# Altium PCB PCB_B.PcbDoc
Units mm, origin at the board's own origin, x right, y up, seen from the top; angles counter-clockwise.
Board outline 200 x 100 mm, 2 copper layers (Top Layer, Bottom Layer), stack 2.071 mm thick; 66 components, 51 nets, 153 pads, 0 vias.
Unrouted connection lines stored in the file: 98.
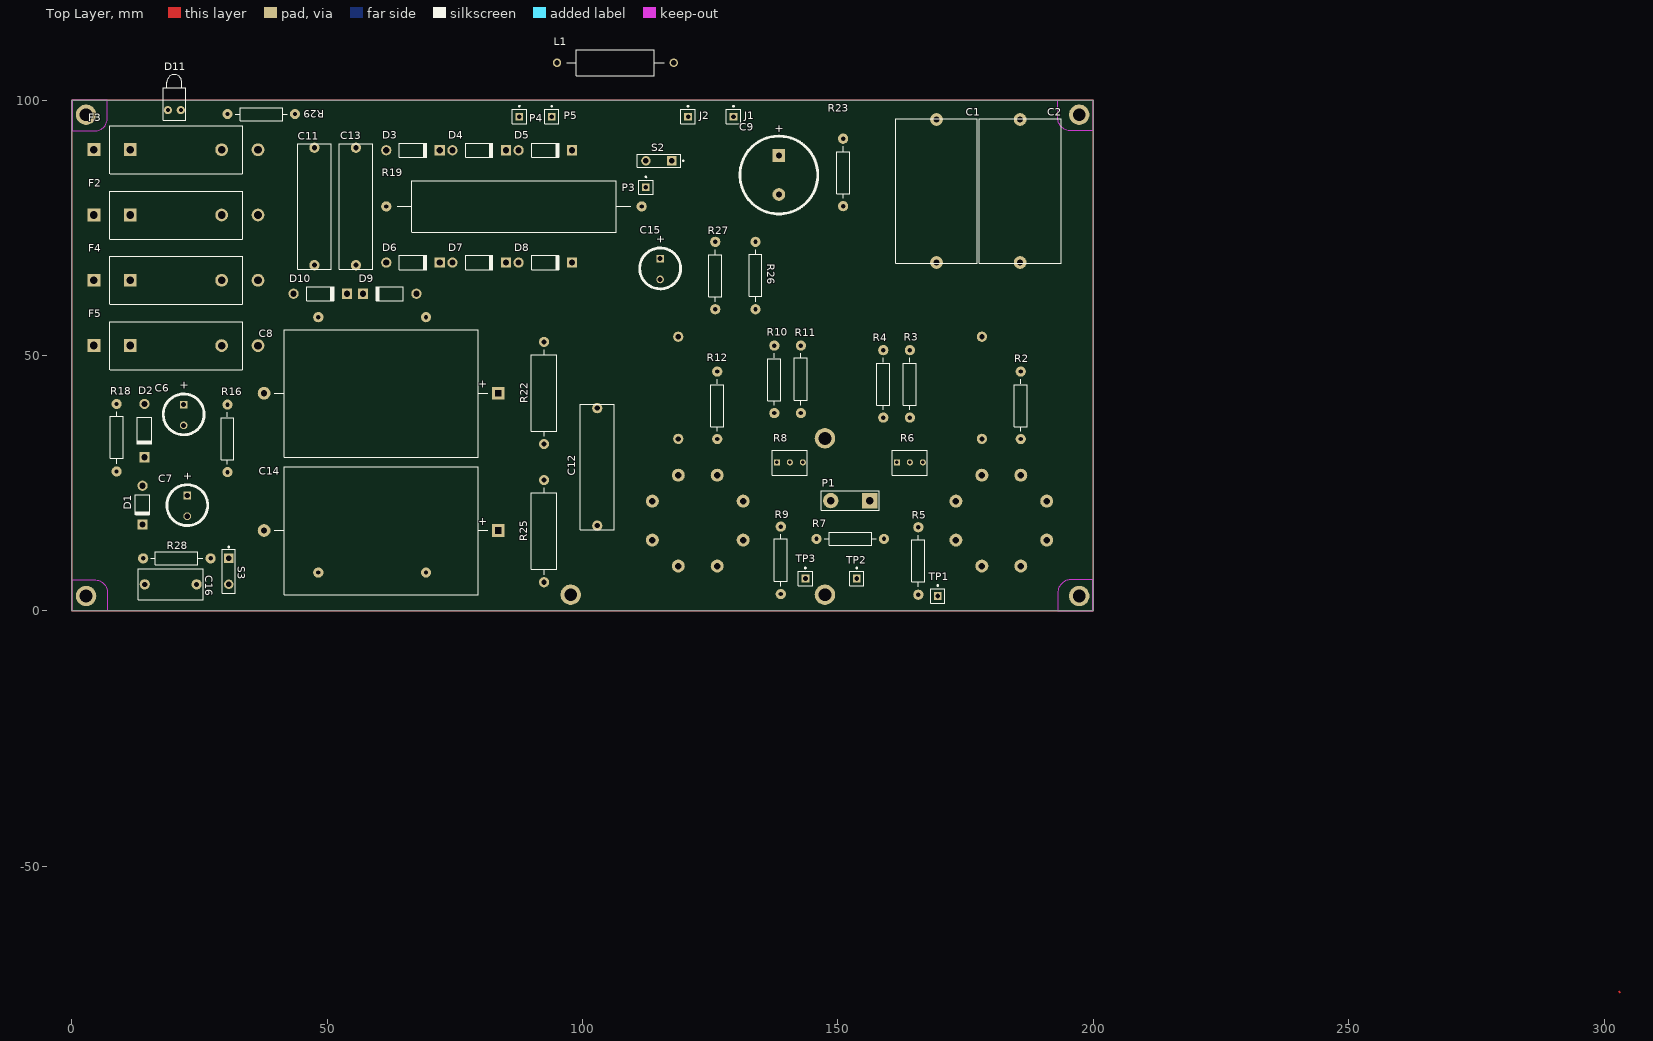
[diagram p0: Top Layer view]
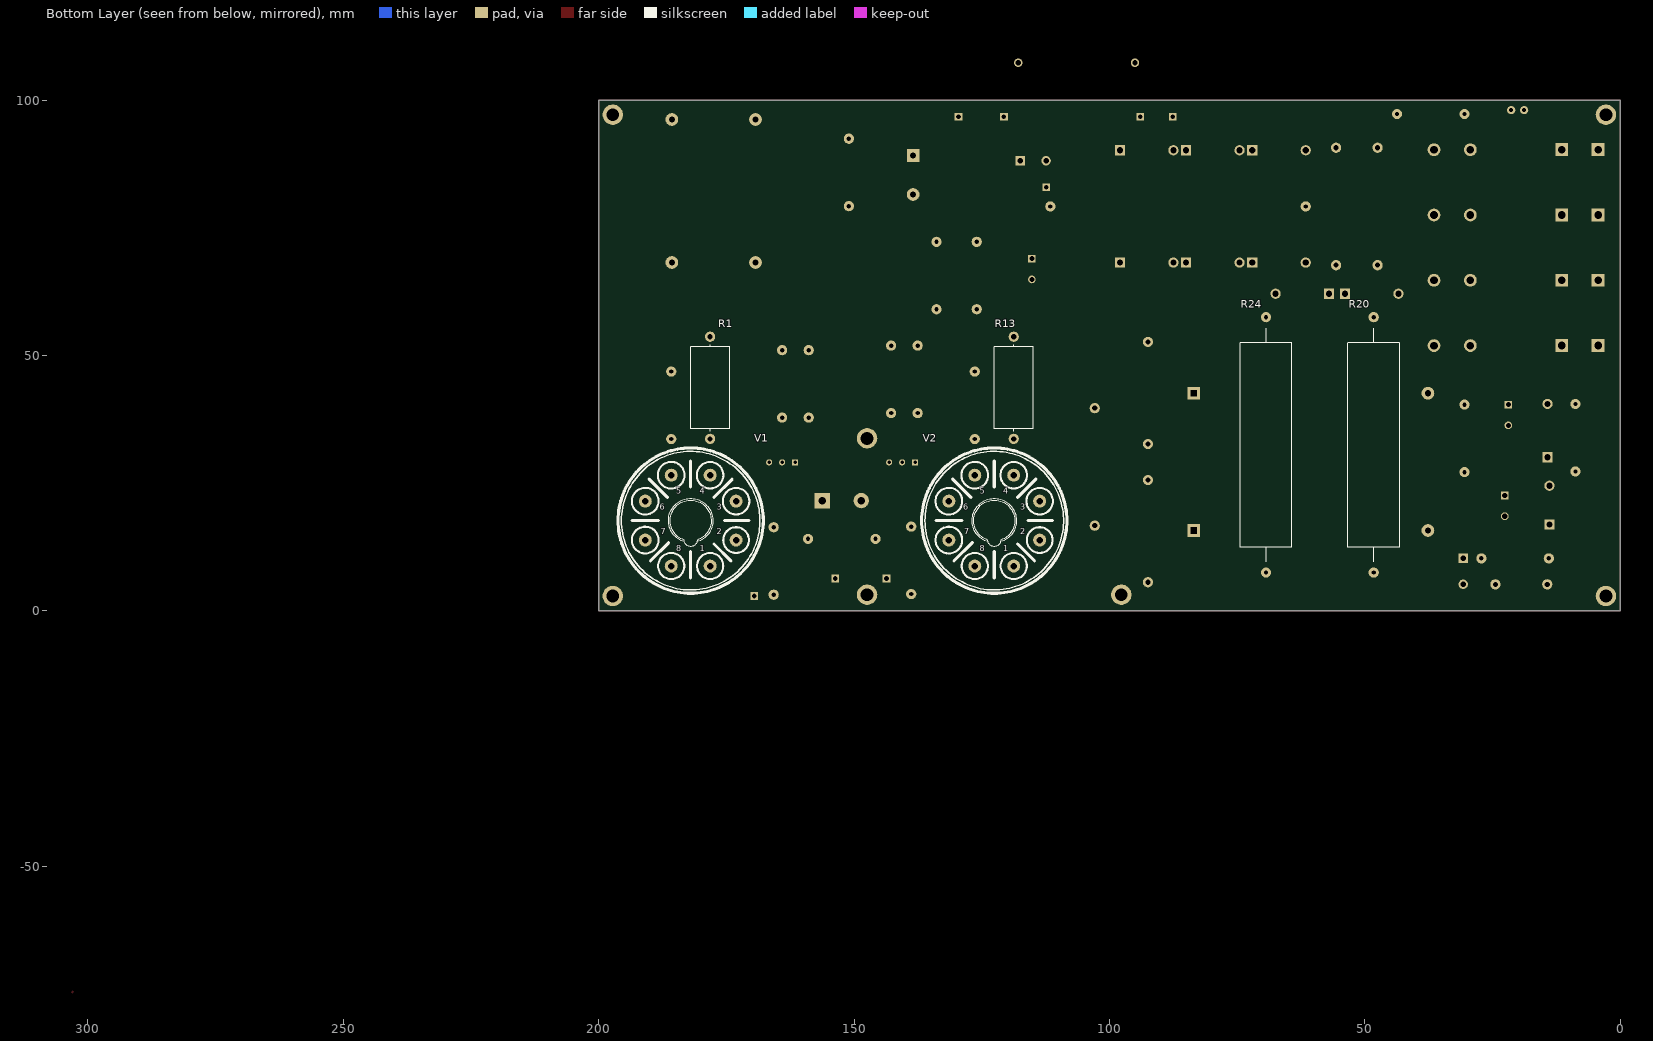
[diagram p1: Bottom Layer view, seen from below]

## Layer stack, top to bottom
Top Solder: solder mask 0.0102, Solder Resist, Dk 3.5
Top Layer: signal copper 0.0356
Dielectric 1: dielectric 2, FR-4, Dk 4.8
Bottom Layer: signal copper 0.0356
Bottom Solder: solder mask 0.0102, Solder Resist, Dk 3.5

## Board outline
0,0 200,0 200,100 0,100

## Design rules (kind name [scope] priority, off if disabled: settings)
Clearance [All] p1: gap=0.254
Height [All] p1: minheight=0 maxheight=35 prefheight=12.7
PolygonConnect [All] p1: connectstyle=Relief reliefconductorwidth=0.254 reliefentries=4 polygonreliefangle="90 Angle" airgapwidth=0.254
RoutingVias [All] p1: holewidth=0.711 width=1.27 viastyle="Through Hole" minholewidth=0.711 minwidth=1.27 maxholewidth=0.711 maxwidth=1.27
SolderMaskExpansion [All] p1: expansion=0.102
Width [All] p1: maxlimit=0.254 minlimit=0.254 preferedwidth=0.254
28 further rules are at their usual default settings.

## Classes and differential pairs
component class powersupply: 1 2 C6 C7 C8 C9 C11 C12 C13 C14 C15 C16 D1 D2 D3 D4 D5 D6 D7 D8 D9 D10 D11 F2 F3 F4 F5 L1 P3 P4 P5 R16 R18 R19 R20 R22 R23 R24 R25 R26 R27 R28 R29 S2 S3
component class poweramp: C1 C2 J1 J2 P1 R1 R2 R3 R4 R5 R6 R7 R8 R9 R10 R11 R12 R13 TP1 TP2 TP3 V1 V2

## Components (designator, comment, footprint, x,y, rotation, side; value= is the part's Value field where it differs from the comment)
C1 "Orange Drop Capacitor" ORANGE-DROP-100nF-600V 169.291,77.216 r270 top
C2 "Orange Drop Capacitor" ORANGE-DROP-100nF-600V 185.674,77.216 r270 top
C6 "Cap Pol Radial Vishay 22uF 100V" RAD-POL-16x20x7.5 21.903,38.481 r90 top
C7 "Cap Pol Radial Vishay 22uF 100V" RAD-POL-16x20x7.5 22.606,20.701 r90 top
C8 "Cap FT Eletrolitic 100uF Axial 350V" "FT Eletrolitic 100uF Axial" 60.503,42.625 r180 top
C9 "Cap Pol Rad" RAD-POL-7.6-15 138.43,85.344 r90 top
C11 "Orange Drop Capacitor" CAP-XICON-100nF-630V 47.498,79.189 r270 top
C12 "Orange Drop Capacitor" CAP-XICON-100nF-630V 102.87,28.194 r90 top
C13 "Orange Drop Capacitor" CAP-XICON-100nF-630V 55.626,79.189 r270 top
C14 "Cap FT Eletrolitic 100uF Axial 350V" "FT Eletrolitic 100uF Axial" 60.503,15.748 r180 top
C15 "Cap Pol Radial Vishay 22uF 100V" RAD-POL-16x20x7.5 115.189,67.056 r90 top
C16 "Orange Drop Capacitor" RAD-0.4 19.355,5.207 r180 top
D1 "D Zener" "ZENER 1W 100V" 13.843,20.701 r270 top
D2 "Diode 1N4007" DO-41 14.224,35.306 r270 top
D3 "Diode 1N4007" "1N4007-10.46mm Diode" 66.802,90.189 r0 top
D4 "Diode 1N4007" "1N4007-10.46mm Diode" 79.756,90.189 r0 top
D5 "Diode 1N4007" "1N4007-10.46mm Diode" 92.71,90.189 r0 top
D6 "Diode 1N4007" "1N4007-10.46mm Diode" 66.802,68.189 r0 top
D7 "Diode 1N4007" "1N4007-10.46mm Diode" 79.756,68.189 r0 top
D8 "Diode 1N4007" "1N4007-10.46mm Diode" 92.71,68.189 r0 top
D9 "Diode 1N4007" "1N4007-10.46mm Diode" 62.23,62.103 r180 top
D10 "Diode 1N4007" "1N4007-10.46mm Diode" 48.641,62.103 r0 top
D11 "POWER LED" LED-1 20.066,98.044 r90 top
F2 "750ma" FUSE-PCB-6x31 20.447,77.512 r0 top
F3 "750ma" FUSE-PCB-6x31 20.447,90.297 r0 top
F4 "6A" FUSE-PCB-6x31 20.447,64.728 r0 top
F5 "6A" FUSE-PCB-6x31 20.447,51.943 r0 top
J1 "Socket" PIN1 129.54,96.774 r0 top
J2 "Socket" PIN1 120.65,96.774 r0 top
L1 "Inductor Iron" AXIAL-0.9 106.426,107.315 r0 top
P1 "OT HEADER" HDR2_pin 152.4,21.59 r180 top
P3 "TO Output Transformer" PIN1 112.395,82.931 r0 top
P4 "To PREAMP" PIN1 87.63,96.774 r0 top
P5 "To PREAMP Filter cap VD" PIN1 93.98,96.774 r0 top
R1 "Wire Wound Power Resistor" "Resistor Vishay 5W 1k Power Wirewound" 178.176,43.688 r90 bottom
R2 "Metal Film Resistor 1/2W" AXIAL-0.6 185.796,40.259 r90 top
R3 "Metal Film Resistor 1/2W" AXIAL-0.6 164.084,44.45 r90 top
R4 "Metal Film Resistor 1/2W" AXIAL-0.6 158.877,44.45 r90 top
R5 "Metal Film Resistor 1/2W" AXIAL-0.6 165.735,9.779 r270 top
R6 "3362U trimpot" "33262U trimpot" 164.084,29.083 r0 top
R7 "Metal Film Resistor 1/2W" AXIAL-0.6 152.4,14.097 r180 top
R8 "3362U trimpot" "33262U trimpot" 140.589,29.083 r0 top
R9 "Metal Film Resistor 1/2W" AXIAL-0.6 138.811,9.906 r270 top
R10 "Metal Film Resistor 1/2W" AXIAL-0.6 137.541,45.339 r90 top
R11 "Metal Film Resistor 1/2W" AXIAL-0.6 142.748,45.339 r270 top
R12 "Metal Film Resistor 1/2W" AXIAL-0.6 126.356,40.259 r90 top
R13 "Wire Wound Power Resistor" "Resistor Vishay 5W 1k Power Wirewound" 118.736,43.688 r90 bottom
R16 "Metal Film Resistor 1W" AXIAL-0.6 30.48,33.782 r90 top
R18 "Metal Film Resistor 1W" AXIAL-0.6 8.763,33.909 r270 top
R19 "Wire Wound Power Resistor" "Power Wirewound Resistor 10W - Vishay Dale" 86.572,79.189 r0 top
R20 "Wire Wound Power Resistor" "Power Wirewound Resistor 10W - Vishay Dale" 48.26,32.512 r90 bottom
R22 "Metal Film Resistor 1W" RESISTOR-MetalOxide-3W 92.456,42.672 r90 top
R23 "Metal Film Resistor 1W" AXIAL-0.6 151.003,85.852 r90 top
R24 "Wire Wound Power Resistor" "Power Wirewound Resistor 10W - Vishay Dale" 69.342,32.512 r270 bottom
R25 "Metal Film Resistor 1W" RESISTOR-MetalOxide-3W 92.456,15.621 r90 top
R26 "Metal Film Resistor 1W" AXIAL-0.6 133.858,65.659 r270 top
R27 "Metal Film Resistor 1W" AXIAL-0.6 125.984,65.659 r90 top
R28 "Metal Film Resistor 1W" AXIAL-0.6 20.574,10.287 r0 top
R29 "Metal Film Resistor 1/2W" AXIAL-0.6 37.084,97.282 r180 top
S2 "STAND-BY" SPST-2 114.935,88.138 r180 top
S3 "STAND-BY" SPST-2 30.734,7.747 r270 top
TP1 "Plug" PIN1 169.545,2.921 r0 top
TP2 "Plug" PIN1 153.67,6.35 r0 top
TP3 "Plug" PIN1 143.637,6.35 r0 top
V1 "EL34-P" OKTAL 181.986,17.678 r180 bottom
V2 "EL34-P" OKTAL 122.546,17.678 r180 bottom

## Footprints (in the part's own frame and the unit in brackets; to place one, negate y for a bottom-side part, rotate by r counter-clockwise, add the part's x,y. Pads: shape width x height; smd on the part's side, far side on the other; paste and mask are expansions set on the pad)
"1N4007-10.46mm Diode" [mm] "Diode, Axial; Body 5.2 x 2.7 mm (LxDia. max), Lead Dia. 0.86 mm (max)"
  round 2 hole 1.2: 1(-5.23,0)
  rect 2x2 hole 1.2: 2(5.23,0)
  silkscreen extent -2.65,-1.4 2.75,1.4, body extent -5.63,-1.31 5.63,1.31, height 3.31
"33262U trimpot" [mm] "Thru-Hole; 3 Leads"
  rect 1.2x1.2 hole 0.7: 1(-2.54,0)
  round 1.2 hole 0.7: 2(0,0) 3(2.54,0)
  silkscreen extent -3.43,-2.54 3.43,2.41, body extent -3.3,-3.75 3.3,3.3, height 4.75
AXIAL-0.6 [mm] "Axial Device, Thru-Hole; 2 Leads; 0.6 in Pin Spacing"
  round 2 hole 0.85: 1(-6.604,0) 2(6.604,0)
  silkscreen extent -5.08,-1.27 5.08,1.27, body extent -6.85,-1.5 6.94,1.5, height 3.5
AXIAL-0.9 [mm] "Axial Device, Thru-Hole; 2 Leads; 0.9 in Pin Spacing"
  round 1.65 hole 1: 1(-11.43,0) 2(11.43,0)
  silkscreen extent -9.53,-2.54 9.53,2.54
CAP-XICON-100nF-630V [mm] "Radial Cap, Thru-Hole; 2 Leads; 0.4 in Pin Spacing"
  round 2 hole 1: 1(-11.5,0) 2(11.5,0)
  silkscreen extent -12.3,-3.3 12.3,3.3, body extent -12,-2.92 11.75,2.83, height 10.92
DO-41 [mm] "Diode, Axial; Body 5.2 x 2.7 mm (LxDia. max), Lead Dia. 0.86 mm (max)"
  round 2 hole 1.2: 1(-5.23,0)
  rect 2x2 hole 1.2: 2(5.23,0)
  silkscreen extent -2.65,-1.4 2.75,1.4
"FT Eletrolitic 100uF Axial" [mm] "FT Axial Eletrolitic Capacitor Thru-Hole; 2 Leads; 45.0mm Pin Spacing"
  rect 2.5x2.5 hole 1.2 square: 1(-22.987,0)
  round 2.5 hole 1.2: 2(22.86,0)
  silkscreen extent -20.96,-12.45 20.83,12.57, body extent -23.14,-12.5 23.14,12.5, height 27.6
FUSE-PCB-6x31 [mm] "Thru-Hole; 2 Leads"
  rect 2.5x2.5 hole 1.5: 1(-16.129,0.017) 1(-9.017,0.017)
  round 2.5 hole 1.5: 2(8.888,0) 2(16,0)
  silkscreen extent -13,-4.7 13,4.7, body extent -16.13,-3.45 16,3.46, height 11.67
HDR2_pin [mm] "Connector; Header; 2 Position"
  rect 3x3 hole 1.5: 1(-3.81,0)
  round 3 hole 1.5: 2(3.81,0)
  silkscreen extent -5.71,-1.91 5.71,1.91
LED-1 [mm] "LED; 2 Leads"
  round 1.6 hole 0.8: 1(0,1.27) 2(0,-1.27)
  silkscreen extent -2,-2.2 6.95,2.2
OKTAL [mm]
  round 2.54 hole 1.27: 1(3.81,-8.89) 2(8.89,-3.81) 3(8.89,3.81) 4(3.81,8.89) 5(-3.81,8.89) 6(-8.89,3.81) 7(-8.89,-3.81) 8(-3.81,-8.89)
  silkscreen extent -14.22,-14.22 14.22,14.22, body extent -14.7,-14.7 14.7,14.7, height 16.7
ORANGE-DROP-100nF-600V [mm] "Orange Drop Capacitor 100nF WxLxH=28x16x25 mm"
  round 2.5 hole 1.2: 1(-19,0) 2(9,0)
  silkscreen extent -19.13,-8 9.14,8, body extent -19.01,-8 9,8, height 21
PIN1 [mm] "Connector; Plug"
  rect 1.5x1.5 hole 0.9: 1(0,0)
  silkscreen extent -1.4,-1.4 1.4,2.17
"Power Wirewound Resistor 10W - Vishay Dale" [mm] "Axial Device, Thru-Hole; 2 Leads; 50mm Pin Spacing"
  round 2 hole 0.85: 1(-25,0) 2(25,0)
  silkscreen extent -22.86,-5.08 22.86,5.08, body extent -25.4,-4.77 25.4,4.83, height 12.3
RAD-0.4 [mm] "Radial Cap, Thru-Hole; 2 Leads; 0.4 in Pin Spacing"
  round 2 hole 1: 1(-5.08,0) 2(5.08,0)
  silkscreen extent -6.35,-3.05 6.35,3.05
RAD-POL-7.6-15 [mm] "Polarized Capacitor (Radial); 2 Leads"
  rect 2.5x2.5 hole 1.2: 1(3.81,0)
  round 2.5 hole 1.2: 2(-3.81,0)
  silkscreen extent -7.62,-7.62 7.62,7.62, body extent -8.18,-8.22 8.25,8.22, height 27
RAD-POL-16x20x7.5 [mm] "Vishay 22uF 100V Polarized Capacitor (Radial); 2 Leads"
  rect 1.5x1.5 hole 1: 1(1.905,0)
  round 1.5 hole 1: 2(-2.159,0)
  silkscreen extent -4,-4 4,4, body extent -4,-3.99 4,3.99, height 13
"Resistor Vishay 5W 1k Power Wirewound" [mm] "Axial Device, Thru-Hole; 2 Leads; 1.0 in Pin Spacing"
  round 2 hole 1: 1(-10,0) 2(10,0)
  silkscreen extent -8.51,-3.81 8.38,3.81, body extent -10.4,-3.75 10.4,3.75, height 9.5
RESISTOR-MetalOxide-3W [mm] "Axial Device, Thru-Hole; 2 Leads; 0.6 in Pin Spacing"
  round 2 hole 1: 1(-10,0) 2(10,0)
  silkscreen extent -8.51,-2.5 8.51,2.5, body extent -11.1,-3.3 11.1,3.3, height 8.3
SPST-2 [mm] "Switch; 2 Leads"
  rect 1.85x1.85 hole 1.1: 1(-2.54,0)
  round 1.85 hole 1.1: 2(2.54,0)
  silkscreen extent -4.89,-1.27 4.28,1.27
"ZENER 1W 100V" [mm] "Zenner Diode - Brand Pending"
  round 2 hole 1.2: 1(-3.81,0)
  rect 2x2 hole 1.2: 2(3.81,0)
  silkscreen extent -2.03,-1.4 2,1.4, body extent -4.2,-1.33 4.2,1.33, height 3.33

## Part data
C1 C2: library part Cap-Orange-DROP_600V, "Capacitor"
C6 C7 C15: "Vishay 22uF 100V Polarized Capacitor (Radial); 2 Leads"
C8 C14: "FT Eletrolitic Polarized Capacitor Axial 100uF"
C9: "Polarized Capacitor (Axial)"
C11 C12 C13 C16: library part Cap-XICON-100nF-630V, "Capacitor XICON (WINE COVER) Polypropilene CAP 630V"
D1: "Zener Diode"
D2 D3 D4 D5 D6 D7 D8 D9 D10: "1 Amp General Purpose Rectifier"
D11: library part LED1, "Typical RED GaAs LED"
F2 F3 F4 F5: library part "Fuse 2", "Fuse"
L1: "Magnetic-Core Inductor"
P1: library part "Header 2", "Header, 2-Pin"
P3 P4 P5: library part Plug, "Plug"
R1 R13 R20 R24: library part "Res Wire Wound Power Resistor 5W", "Semiconductor Resistor"
R2 R3 R4 R5 R7 R9 R10 R11 R12 R29: library part "Res Metal Film 1/2W", "Semiconductor Resistor"
R6 R8: "3362U Timpot"
R16 R18 R22 R23 R25 R26 R27 R28: library part "Res Wire Wound 1W", "Semiconductor Resistor"
R19: library part "Res Vishay Dale Wire Wound Power Resistor 10R 10W", "Semiconductor Resistor"
S2 S3: library part SW-SPST, "Single-Pole, Single-Throw Switch"

## Free pads (board coordinates)
  round 4 hole 2.5: 0(2.794,2.921) 0(2.794,97.155) 0(97.663,3.175) 0(147.447,3.175) 0(147.447,33.782) 0(197.231,2.921) 0(197.231,97.155)

## Nets (pads, with @x,y where several pads share a name; then routed paths per layer and width w, separated by ;. In a path a pad name is that pad's centre, name@x,y a point inside that pad or via, vN(x,y) a via of type N, cw(c..) or ccw(c..) an arc to the next point about the centre after c; other vN are vias at no path point)
BIAS: C7.1 D1.1 R4.1 R6.2 R8.2 R10.1 R16.1
GND: C6.2 C7.2 C9.2 C11.1 C12.1 C13.2 C14.2 C15.2 C16.1 D1.2 R5.1 R7.2 R9.2 R23.1 R25.1 R27.1 R28.2 S3.1 S3.2 TP2.1
"HEATER 1": V1.2 V2.2
"HEATER 2": V1.7 V2.7
"HEATER CT": C15.1 D11.2 R26.1 R27.2
Net1_1: 
Net1_2: 
Net2_1: 
NetC1_1: C1.1 J1.1
NetC1_2: C1.2 R2.1 R3.1
NetC2_1: C2.1 J2.1
NetC2_2: C2.2 R11.2 R12.1
NetC6_1: C6.1 D2.1 R16.2
NetC8_2: C8.2 C14.1 R22.1 R25.2
NetC11_2: C11.2 F2.2 R20.1
NetC13_1: C13.1 F3.2 R24.1
NetC16_2: C16.2 R28.1
NetD2_2: D2.2 R18.2
NetD3_1: D3.1 R20.2
NetD3_2: D3.2 D4.1
NetD4_2: D4.2 D5.1
NetD5_2: D5.2 D8.2 R19.1
NetD6_1: D6.1 R24.2
NetD6_2: D6.2 D7.1
NetD7_2: D7.2 D8.1
NetD9_1: D9.1 F5.2
NetD9_2: D9.2 D10.2 R29.1
NetD10_1: D10.1 F4.2
NetF1_1: 
NetF1_2: 
NetF2_1: F2.1
NetF3_1: F3.1
NetF4_1: F4.1
NetF5_1: F5.1
NetP1_1: P1.1 V1.3
NetP1_2: P1.2 V2.3
NetP5_1: P5.1 R26.2
NetR1_1: R1.1 V1.4
NetR2_2: R2.2 V1.5
NetR3_2: R3.2 R4.2 R6.3
NetR5_2: R5.2 TP1.1 V1.1 V1.8
NetR6_1: R6.1 R7.1 R8.1
NetR8_3: R8.3 R10.2 R11.1
NetR9_1: R9.1 TP3.1 V2.1 V2.8
NetR12_2: R12.2 V2.5
NetR13_1: R13.1 V2.4
NetR18_1: R18.1
"PWD LED": D11.1 R29.2
"PWD STANDBY": C8.1 C12.2 R19.2 R22.2 S2.1
VA: L1.1 P3.1 S2.2
VS: C9.1 L1.2 P4.1 R1.2 R13.2 R23.2
pads on no net: V1.6 V2.6
copper on no net: | length 600.4
  Top Layer w0.254: 302.895,-74.473 303.149,-74.727 ; 0,0 0,100 200,100 200,0 0,0

## Keep-outs
Top Layer:
  region: 0.127,93.98 4.445,93.98 ccw(c4.445,96.52) 6.985,96.52 6.985,100 0.127,100
  region: 0.127,6.096 4.445,6.096 cw(c4.445,3.556) 6.985,3.556 6.985,0.076 0.127,0.076
  region: 199.898,6.096 195.58,6.096 ccw(c195.58,3.556) 193.04,3.556 193.04,0.076 199.898,0.076
  region: 199.898,93.98 195.58,93.98 cw(c195.58,96.52) 193.04,96.52 193.04,100 199.898,100

## Text inside footprints (layer, text, board x,y; h text height)
C6: Top Overlay "+" at 22.665,43.307 h1.5 r90
C7: Top Overlay "+" at 23.368,25.527 h1.5 r90
C8: Top Overlay "+" at 81.331,45.038 h1.52 r180
C9: Top Overlay "+" at 139.167,93.476 h1.5 r90
C14: Top Overlay "+" at 81.331,18.161 h1.52 r180
C15: Top Overlay "+" at 115.951,71.882 h1.5 r90
V1: Bottom Overlay "1" at 180.208,11.328 h1.97; Bottom Overlay "2" at 176.906,14.63 h1.97; Bottom Overlay "3" at 176.906,19.456 h1.97; Bottom Overlay "4" at 180.208,22.504 h1.97; Bottom Overlay "5" at 184.78,22.504 h1.97; Bottom Overlay "6" at 188.082,19.456 h1.97; Bottom Overlay "7" at 187.828,14.63 h1.97; Bottom Overlay "8" at 184.78,11.328 h1.97
V2: Bottom Overlay "1" at 120.768,11.328 h1.97; Bottom Overlay "2" at 117.466,14.63 h1.97; Bottom Overlay "3" at 117.466,19.456 h1.97; Bottom Overlay "4" at 120.768,22.504 h1.97; Bottom Overlay "5" at 125.34,22.504 h1.97; Bottom Overlay "6" at 128.642,19.456 h1.97; Bottom Overlay "7" at 128.388,14.63 h1.97; Bottom Overlay "8" at 125.34,11.328 h1.97